# Altium PCB main.PcbDoc
Units mm, origin at the board's own origin, x right, y up, seen from the top; angles counter-clockwise.
Board outline 68.14 x 28.3 mm, 2 copper layers (Top Layer, Bottom Layer); 2 components, 3 nets, 10 pads, 8 vias.
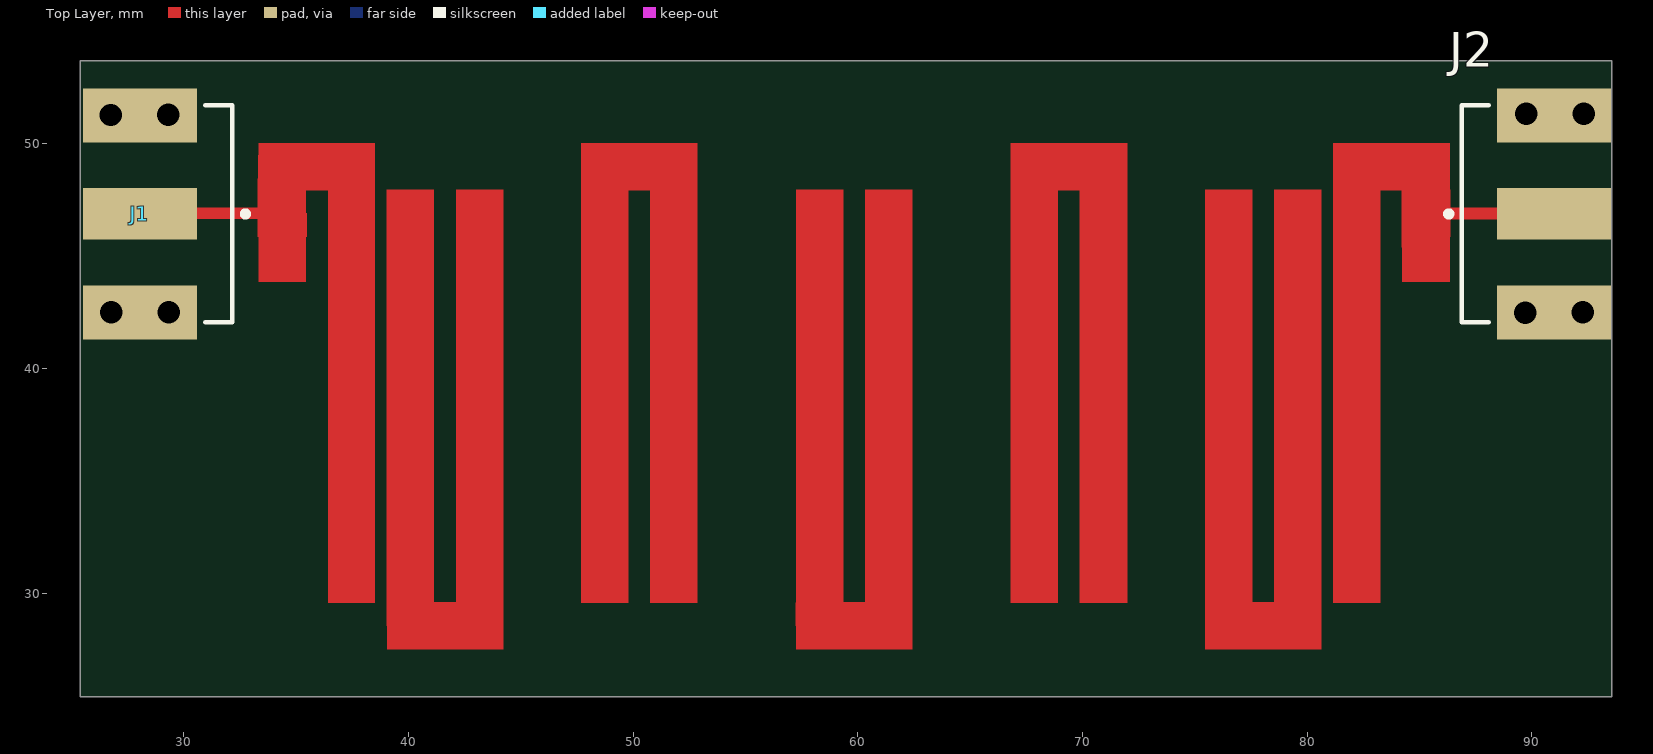
[diagram p0: Top Layer view]
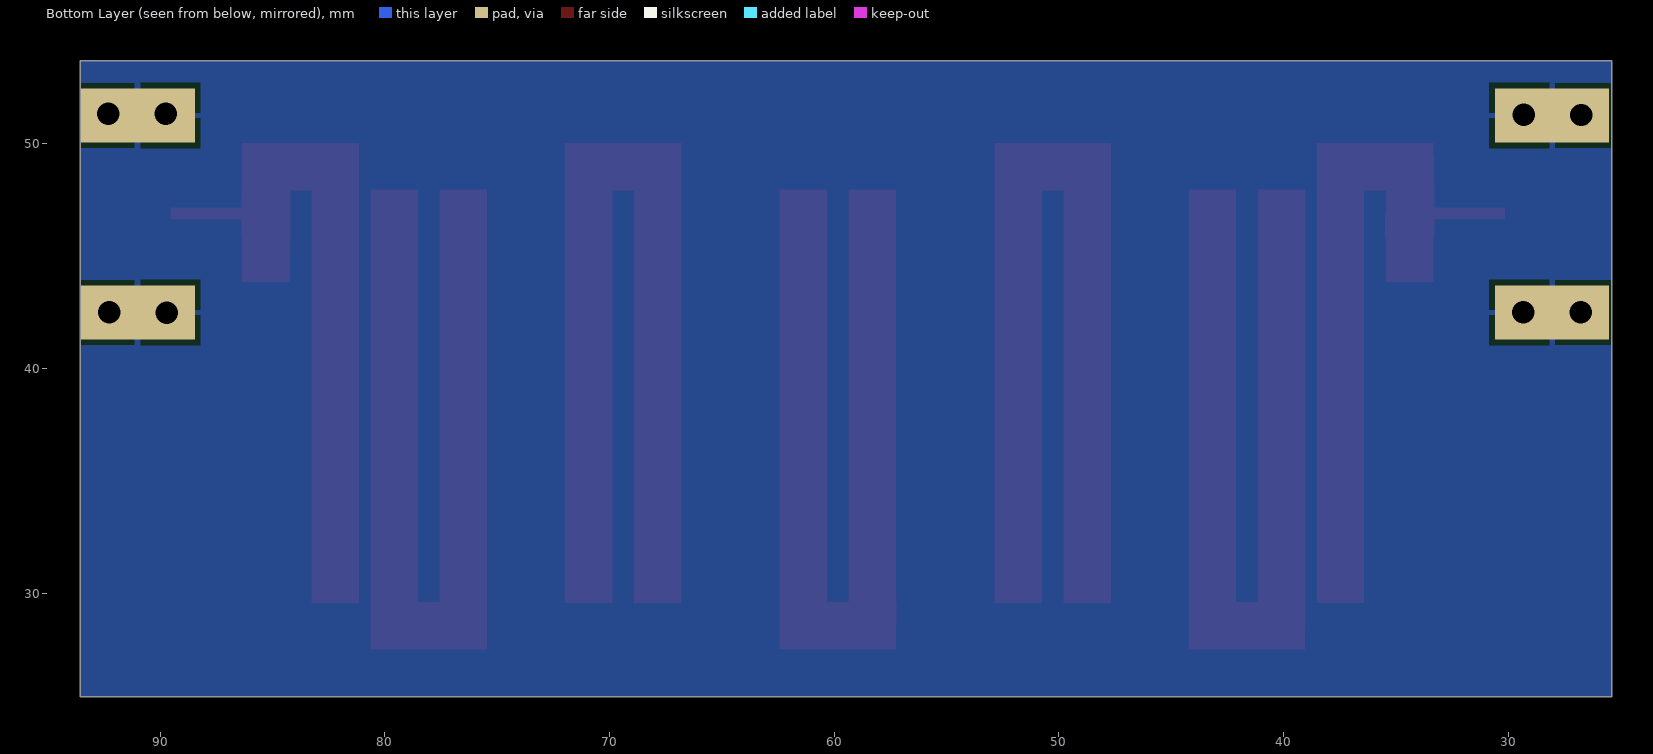
[diagram p1: Bottom Layer view, seen from below]

## Layer stack, top to bottom
Top Solder: solder mask 0.0102, Solder Resist, Dk 3.5
Top Layer: signal copper 0.0356
Dielectric 1: dielectric 0.32, FR-4, Dk 4.8
Bottom Layer: signal copper 0.0356
Bottom Solder: solder mask 0.0102, Solder Resist, Dk 3.5

## Board outline
25.4,25.4 93.545,25.4 93.545,53.7 25.4,53.7

## Design rules (kind name [scope] priority, off if disabled: settings)
Clearance [All] p1: gap=0.254 ignorepadtopadclearanceinfootprint=FALSE
PolygonConnect [All] p1: connectstyle=Relief reliefconductorwidth=0.254 reliefentries=4 polygonreliefangle="90 Angle" airgapwidth=0.254
RoutingVias [All] p1: holewidth=0.711 width=1.27 viastyle="Through Hole" minholewidth=0.711 minwidth=1.27 maxholewidth=0.711 maxwidth=1.27
SolderMaskExpansion [All] p1: expansion=0.102 istentingtop=FALSE
SupplyNets "Schematic Supply Nets" [InNet('GND')] p1: voltage=0.000
Width [All] p1: maxlimit=0.254 minlimit=0.254 preferedwidth=0.254
30 further rules are at their usual default settings.

## Components (designator, comment, footprint, x,y, rotation, side; value= is the part's Value field where it differs from the comment)
J1 "142-0701-801" FP-142-0701-801-MFG 24.77,46.884 r180 top
J2 "142-0701-801" FP-142-0701-801-MFG 94.272,46.885 r0 top

## Footprints (in the part's own frame and the unit in brackets; to place one, negate y for a bottom-side part, rotate by r counter-clockwise, add the part's x,y. Pads: shape width x height; smd on the part's side, far side on the other; paste and mask are expansions set on the pad)
FP-142-0701-801-MFG [mil]
  rect 200x90 smd paste+0 mask+0: 1(-129,0)
  rect 200x95 smd paste+0 mask+0: 2(-129,172.5) 3(-129,-172.5)
  rect 200x95 smd far side paste+0 mask+0: 2(-129,172.5) 3(-129,-172.5)
  silkscreen extent -319,-190 -244,190, body extent -295,-224 295,224, height 10

## Part data
J1 J2: library part CMP-09588-000002-1, "CONN SMA JACK STR 50OHM EDGE MNT", Case/Package=SMA, Frequency=18GHz, Max Operating Temperature=165°C, Min Operating Temperature=-65°C, Operating Frequency="0 to 18 GHz", Package Quantity=5, Voltage Rating=335V, Body Material=Brass, Body Plating=Gold, Connector Type=SMA, Contact Material=Copper, Contact Plating=Gold, Depth=25.58mm, Fastening Type=Threaded, Gender=Female, Impedance=50R, Length=0.44inch, Max Frequency=18GHz, Mount=Edge, Orientation=Straight, Packaging=Bulk, Radiation Hardening=No, RoHS Compliant=Yes, Series=SMA, Termination=Solder

## Via types
v1: diameter 1.5, hole 1, Top Layer to Bottom Layer, 8 vias

## Nets (pads, with @x,y where several pads share a name; then routed paths per layer and width w, separated by ;. In a path a pad name is that pad's centre, name@x,y a point inside that pad or via, vN(x,y) a via of type N, cw(c..) or ccw(c..) an arc to the next point about the centre after c; other vN are vias at no path point)
GND: J1.2 J1.3 J2.2 J2.3
  other v1: 89.702,42.491 92.257,42.501 26.769,42.509 29.324,42.519 26.753,51.287 29.308,51.297 89.745,51.336 92.3,51.346
Resonator1: J1.1
Resonator7: J2.1

## Polygon pours and split planes (outlines as drawn)
GND on Bottom Layer "GND_L02_P018" (solid, pour order 18): 25.4,53.675 93.545,53.675 93.545,25.45 25.425,25.45 25.4,25.425

## Other copper
Top Layer:
  region net Resonator7: 86.358,45.873 86.358,47.953 86.372,47.953 86.372,47.17 89.516,47.17 89.523,47.163 89.523,46.663 89.516,46.657 86.372,46.657
  region net Resonator7: 84.197,46.913 84.197,47.947 83.244,47.947 83.244,47.96 84.237,47.96 84.237,50.026 83.244,50.026 83.244,50.04 84.244,50.04 86.324,50.04 86.331,50.033 86.331,47.96 86.372,47.953 86.372,47.17 89.516,47.17 89.516,47.157 86.372,47.157 86.372,46.67 89.516,46.67 89.516,46.657 86.372,46.657 86.372,45.873 86.331,45.867 86.331,43.873 86.324,43.866 84.244,43.866 84.237,43.873
  region net Resonator7: 83.244,47.947 84.197,47.947 84.197,46.913 84.21,46.92 84.21,47.947 84.251,47.953 84.251,50.033 84.251,47.953 84.244,50.04 83.244,50.04 83.237,50.033
  region net Resonator7: 81.158,29.591 81.158,47.953 81.158,50.033 81.164,50.04 83.244,50.04 83.251,50.033 83.251,29.591 83.244,29.584
  region: 75.458,27.504 77.537,27.504 80.617,27.504 80.624,27.511 80.624,47.953 80.617,47.96 78.537,47.96 78.531,47.953 78.531,29.598 77.544,29.598 77.544,47.953 77.537,47.96 75.458,47.96 75.451,47.953
  region net Resonator1: 36.422,29.591 36.422,47.953 38.502,47.953 38.502,29.591
  region net Resonator1: 33.301,47.947 36.415,47.947 36.422,47.934 38.502,47.934 38.509,47.941 38.509,50.033 38.502,50.04 36.422,50.04 33.342,50.04 33.335,50.033
  region net Resonator1: 33.301,45.867 35.463,45.867 35.47,45.873 35.47,46.913 35.429,46.92 35.429,47.947 35.875,47.947 35.875,47.96 33.301,47.96 33.295,47.953 33.295,45.873 33.295,46.663
  region net Resonator1: 33.342,43.873 33.342,45.873 35.422,45.873 35.422,43.873
  region net Resonator1: 30.15,46.663 33.301,46.663 33.301,47.163 30.15,47.163
  region: 39.049,27.504 41.129,27.504 44.209,27.504 44.215,27.511 44.215,29.591 44.215,47.953 44.209,47.96 42.129,47.96 42.122,47.953 42.122,29.598 41.132,29.598 41.132,47.947 41.134,47.96 39.054,47.96 39.038,47.953 39.038,29.591 39.042,29.585
  region: 47.682,29.591 47.682,47.953 47.682,50.033 47.689,50.04 50.769,50.04 52.849,50.04 52.856,50.033 52.856,29.591 52.849,29.584 50.769,29.584 50.762,29.591 50.762,47.947 49.776,47.947 49.776,29.591 49.769,29.584
  region: 57.253,27.504 59.333,27.504 62.413,27.504 62.42,27.511 62.42,47.953 62.413,47.96 60.333,47.96 60.326,47.953 60.326,29.598 59.346,29.598 59.346,47.953 59.339,47.96 57.26,47.96 57.253,47.953 57.253,29.598 57.247,29.591
  region: 66.811,29.591 66.811,47.953 66.811,50.033 66.817,50.04 69.897,50.04 71.977,50.04 71.984,50.033 71.984,29.591 71.974,29.584 69.895,29.584 69.886,29.591 69.886,47.947 68.904,47.947 68.904,29.591 68.897,29.584

## Silkscreen, mask and mechanical layers (free items; w line width, h text height)
Mechanical 2:
  drawing of 161 lines, arcs and shapes, not listed